# Altium PCB ledchaser.PcbDoc
Units mm, origin at the board's own origin, x right, y up, seen from the top; angles counter-clockwise.
Board outline 87.63 x 81.73 mm, 2 copper layers (Top Layer, Bottom Layer), stack 1.1 mm thick; 19 components, 17 nets, 59 pads, 34 vias.
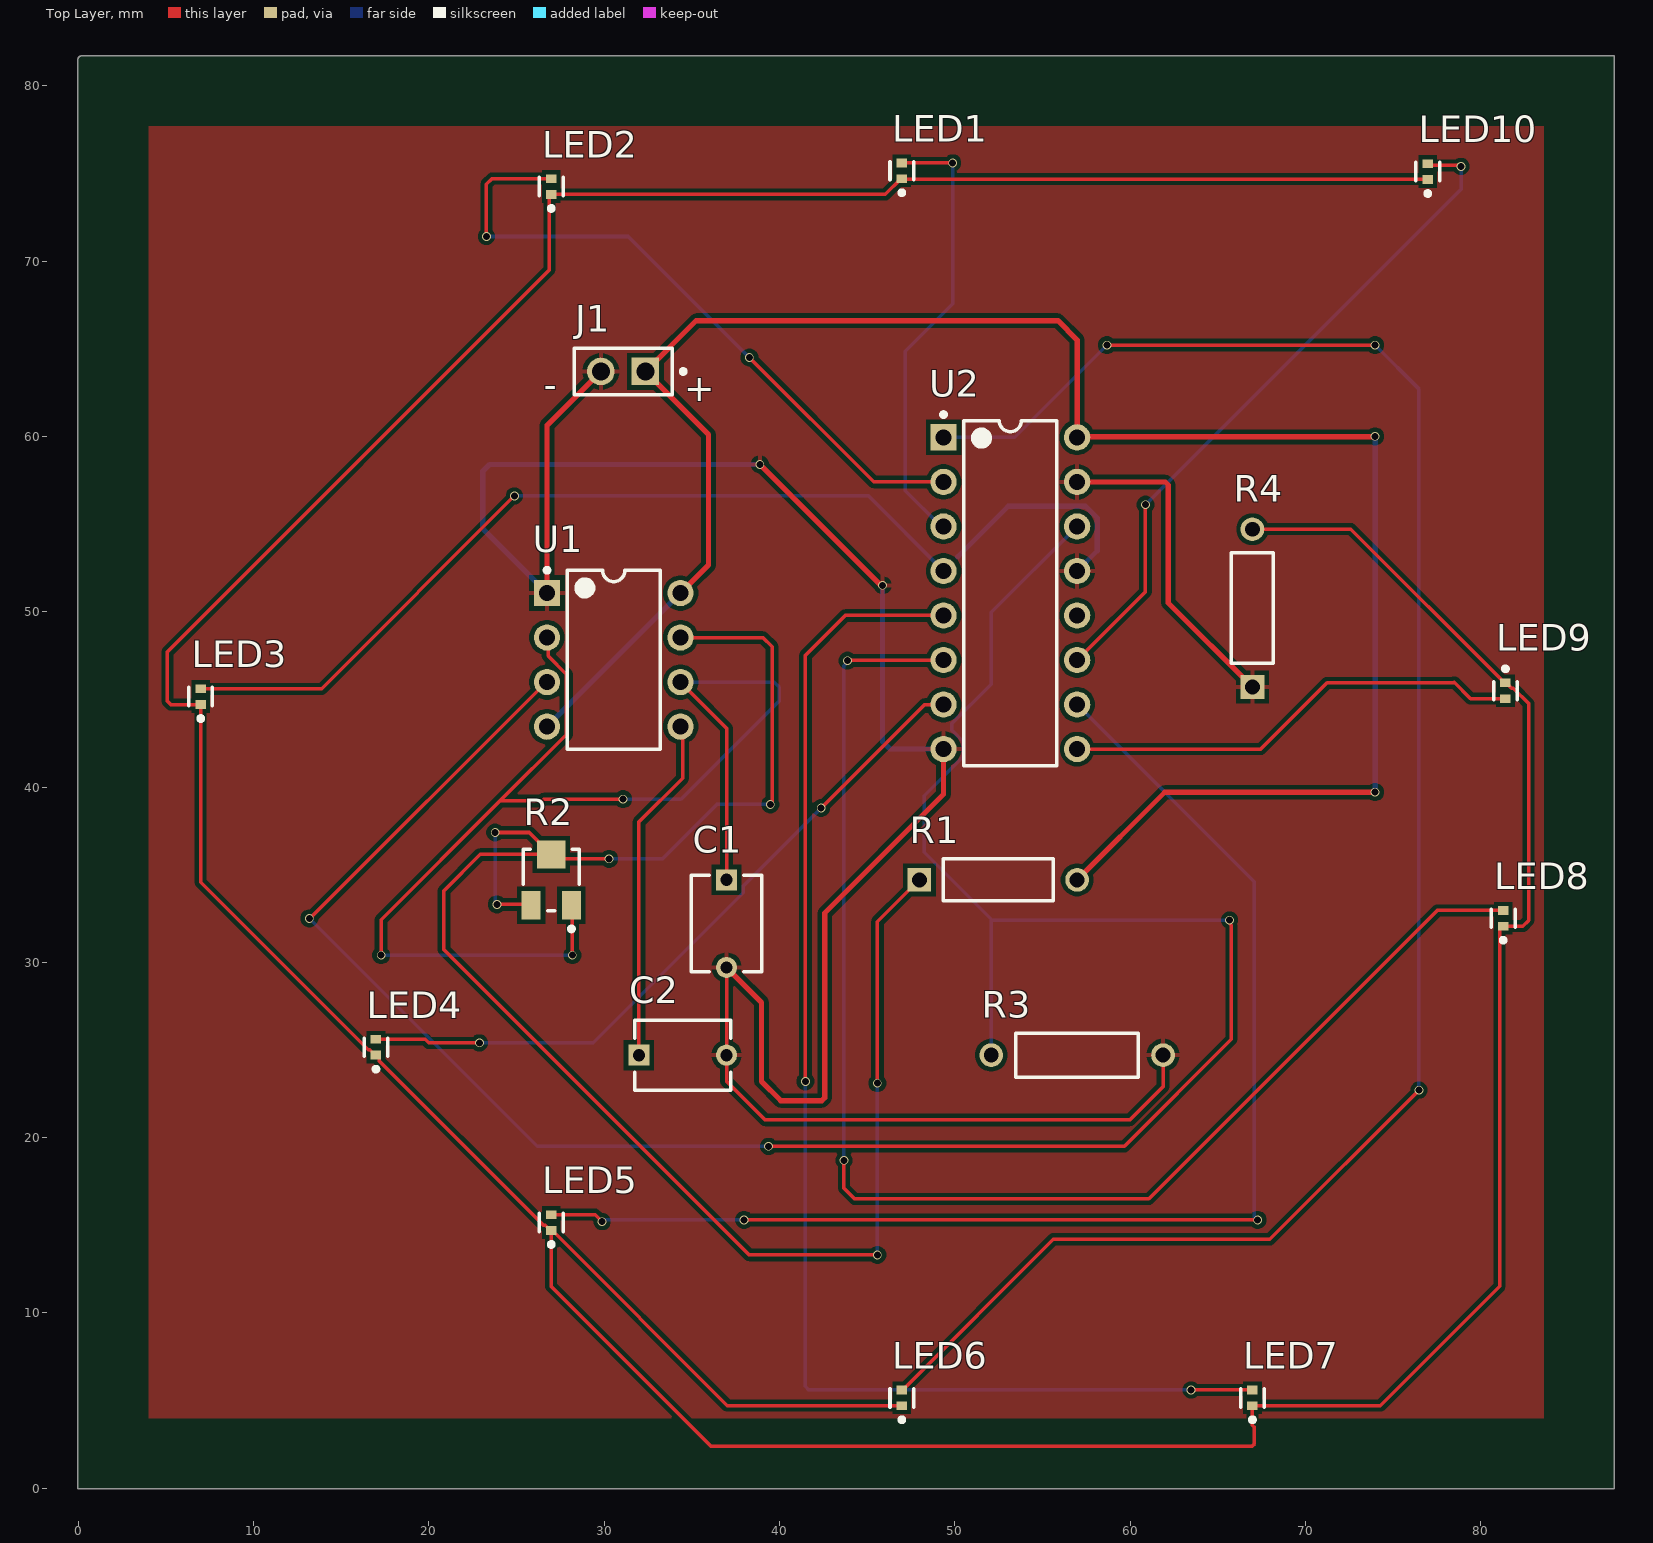
[diagram p0: Top Layer view]
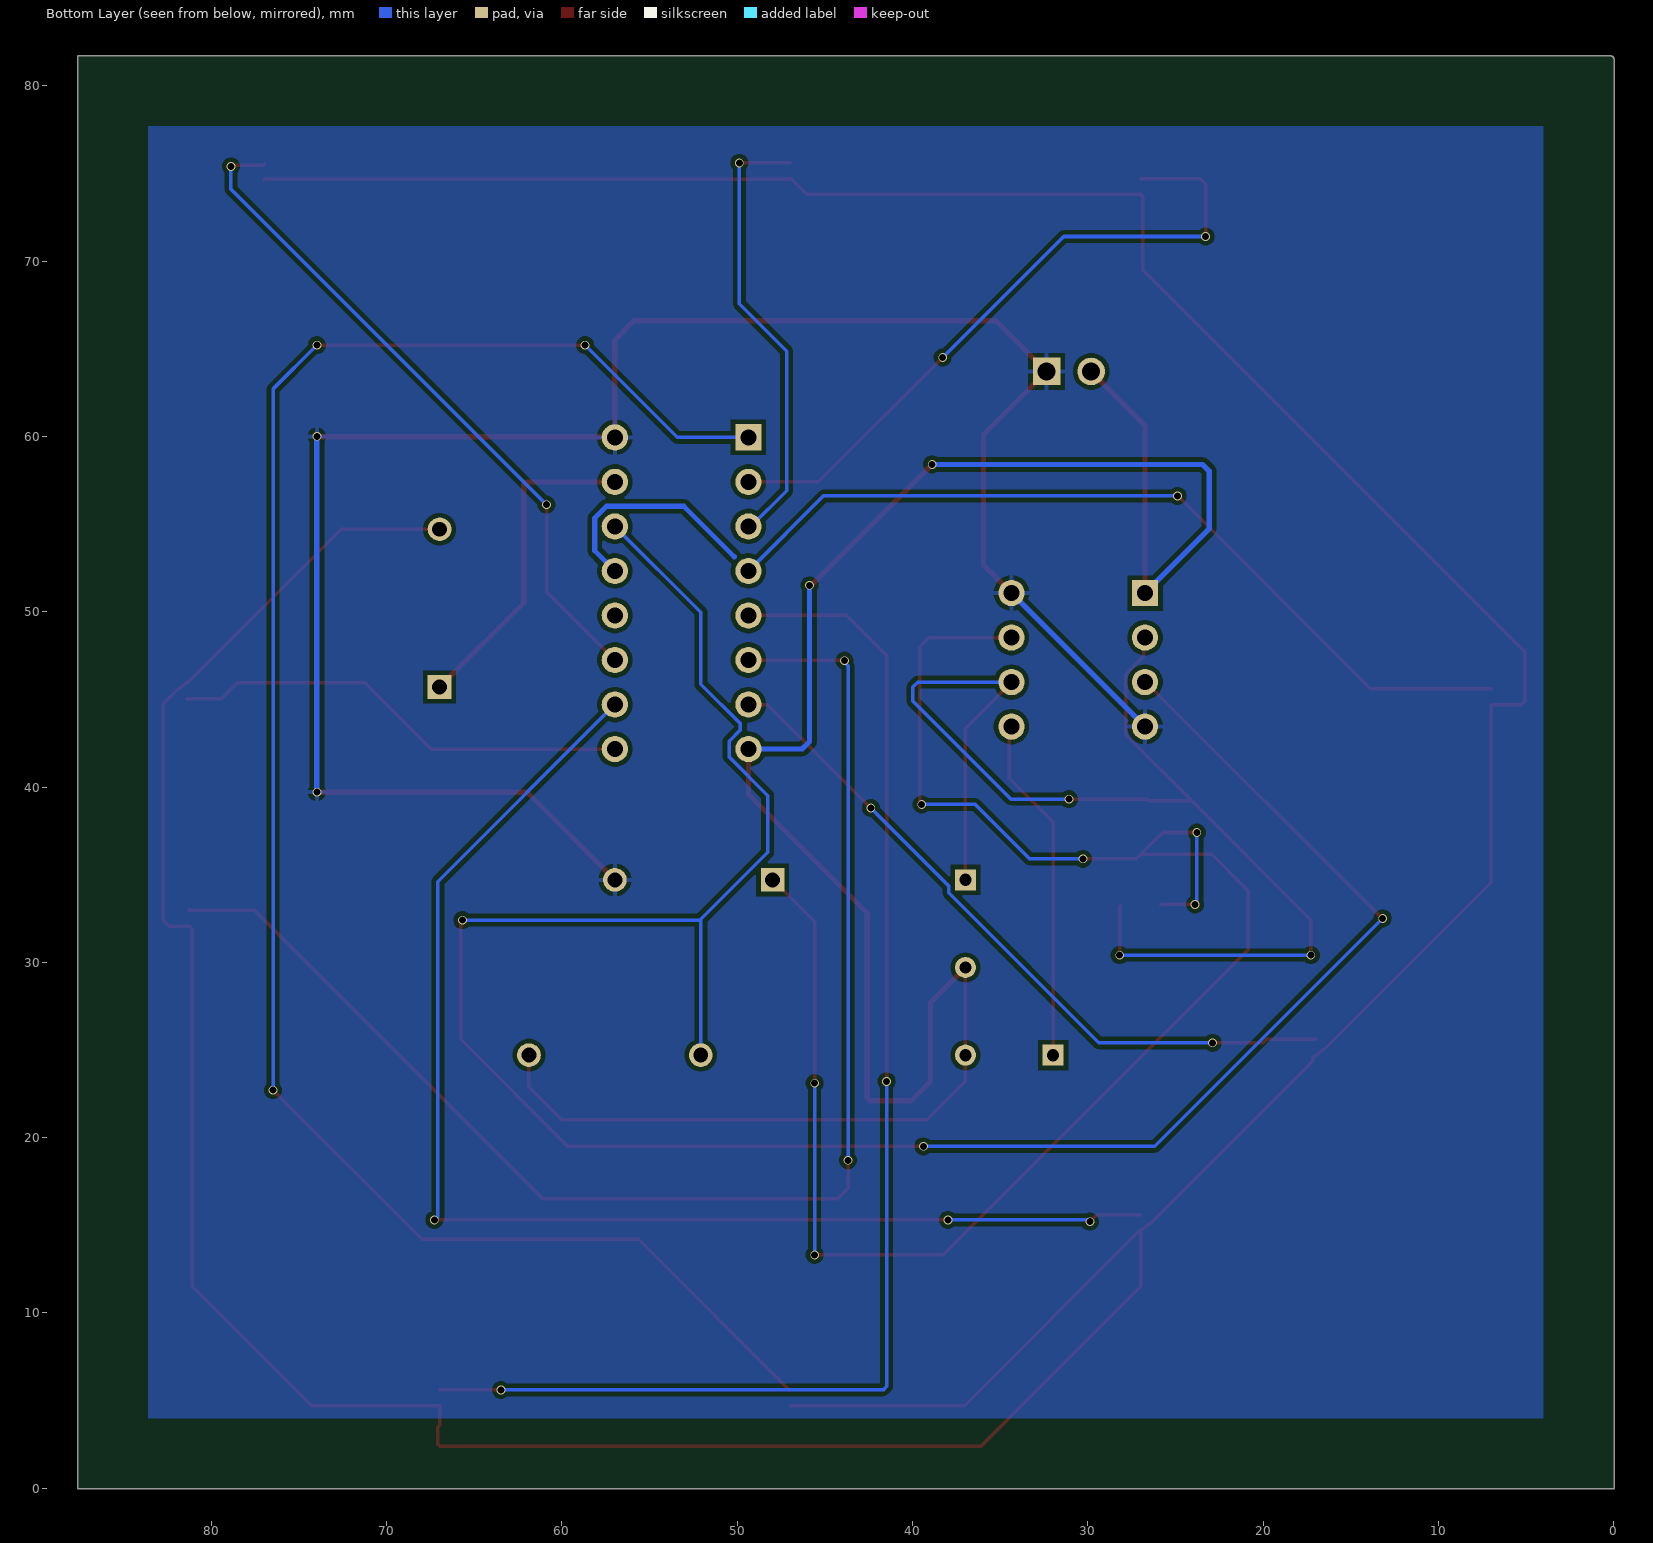
[diagram p1: Bottom Layer view, seen from below]
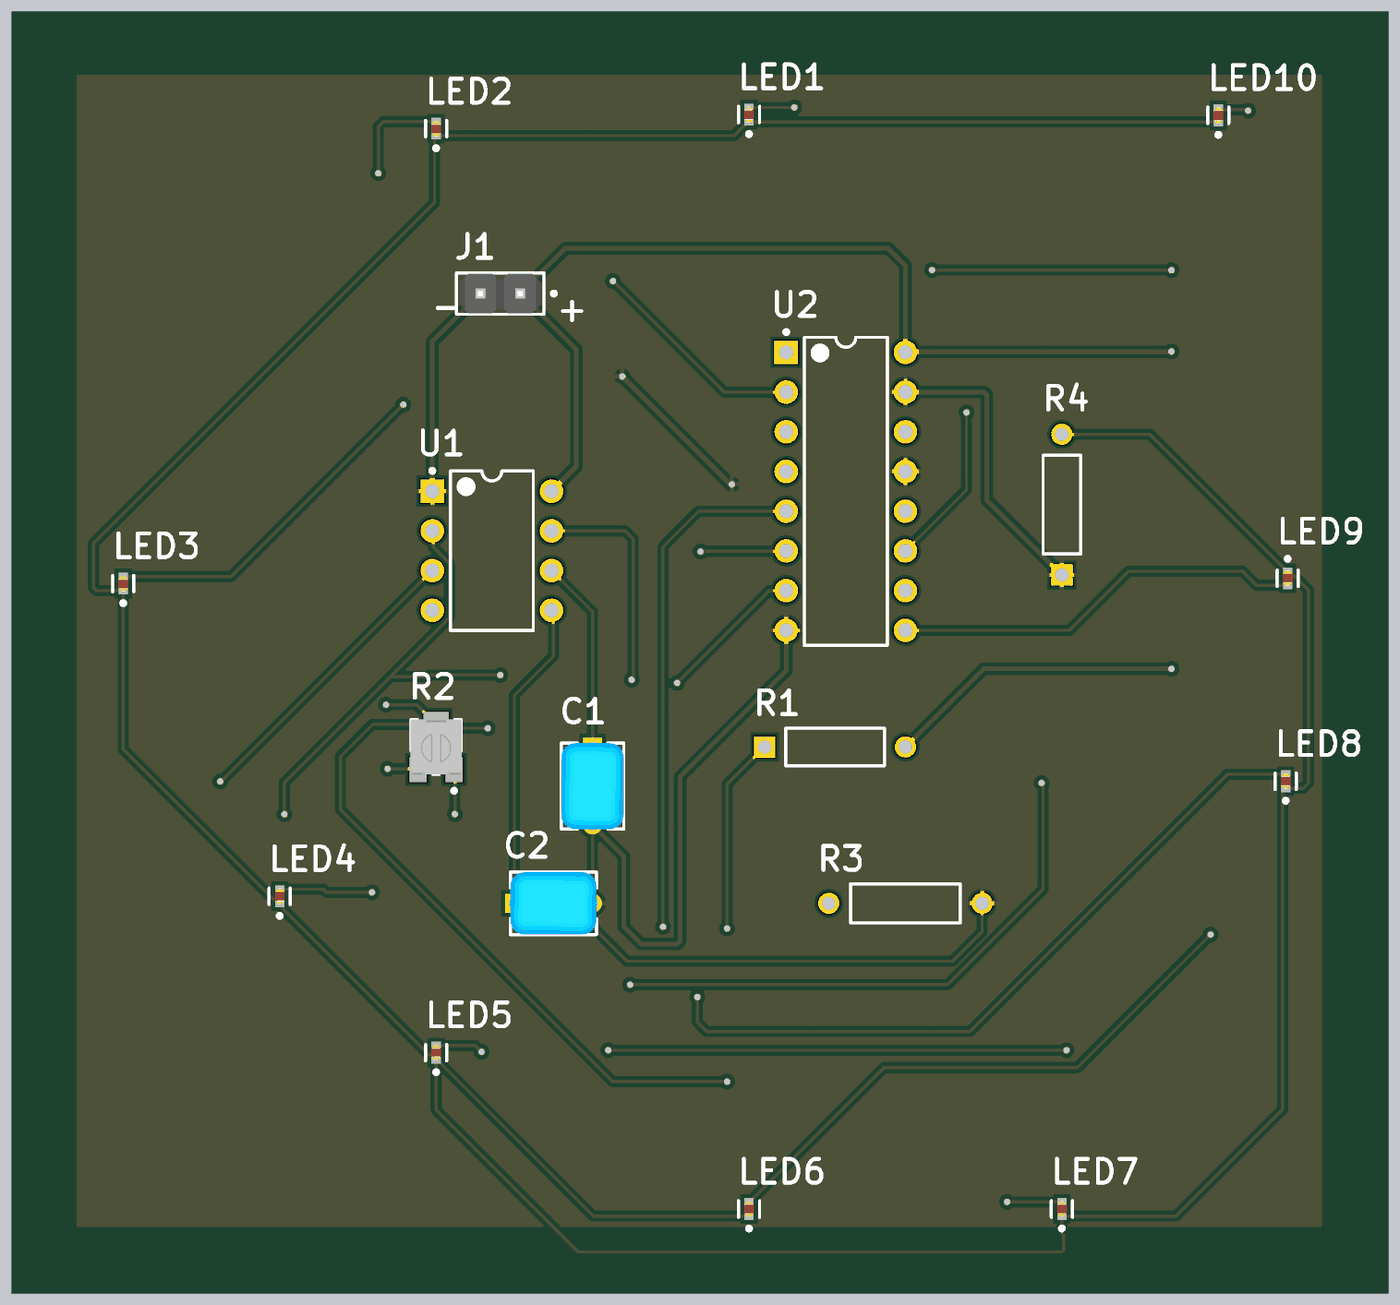
[diagram p2: 3D render of the assembled board from above, using the file's embedded part models]

## Layer stack, top to bottom
Top Solder: solder mask 0.05, SM-001, Dk 4
Top Layer: signal copper 0.1
Dielectric 1: dielectric 0.9, FR-4, Dk 4.8
Bottom Layer: signal copper 0.1
Bottom Solder: solder mask 0.05, SM-001, Dk 4

## Board outline
-0.025,-0.025 87.605,-0.025 87.605,81.705 0.171,81.705 ccw(c0.171,81.509) -0.025,81.509

## Design rules (kind name [scope] priority, off if disabled: settings)
Clearance Clearance_2 [All] p1: gap=0.25 ignorepadtopadclearanceinfootprint=FALSE
Clearance Clearance_1 [All] p2: gap=0.254 ignorepadtopadclearanceinfootprint=FALSE except(0: Arc-Hole Track-Hole SMDPad-Hole THPad-Hole Via-Hole Fill-Hole Poly-Hole Region-Hole Text-Hole)
Clearance [All] p3: gap=0.25 ignorepadtopadclearanceinfootprint=FALSE
NetAntennae [All] p1: netantennaetolerance=39
PolygonConnect [All] p1: connectstyle=Relief reliefconductorwidth=0.254 reliefentries=4 polygonreliefangle="90 Angle" airgapwidth=0.254
RoutingVias [All] p1: holewidth=0.4 width=0.5 viastyle="Through Hole" minholewidth=0.4 minwidth=0.5 maxholewidth=0.4 maxwidth=0.5
SolderMaskExpansion [All] p1: expansion=0.102 istentingtop=FALSE
Width WidthPOW [(InNet('VCC') OR InNet('GND'))] p1: maxlimit=0.3 minlimit=0.2 preferedwidth=0.3
Width [All] p2: maxlimit=0.2 minlimit=0.1 preferedwidth=0.2
29 further rules are at their usual default settings.

## Components (designator, comment, footprint, x,y, rotation, side; value= is the part's Value field where it differs from the comment)
C1 "RCER71E226MWM1H03A" FP-RCEWM1-MFG 36.975,32.205 r270 top
C2 "RCER71E226MWM1H03A" FP-RCEWM1-MFG 34.475,24.705 r0 top
J1 "M20-9990246" FP-M20-9990246-MFG 31.075,63.705 r180 top
LED1 "SML-P11UTT86" FP-SML-P11UTT86-MFG 46.975,75.155 r90 top
LED2 "SML-P11UTT86" FP-SML-P11UTT86-MFG 26.975,74.255 r90 top
LED3 "SML-P11UTT86" FP-SML-P11UTT86-MFG 6.975,45.155 r90 top
LED4 "SML-P11UTT86" FP-SML-P11UTT86-MFG 16.975,25.155 r90 top
LED5 "SML-P11UTT86" FP-SML-P11UTT86-MFG 26.975,15.155 r90 top
LED6 "SML-P11UTT86" FP-SML-P11UTT86-MFG 46.975,5.155 r90 top
LED7 "SML-P11UTT86" FP-SML-P11UTT86-MFG 66.975,5.155 r90 top
LED8 "SML-P11UTT86" FP-SML-P11UTT86-MFG 81.28,32.512 r90 top
LED9 "SML-P11UTT86" FP-SML-P11UTT86-MFG 81.407,45.491 r270 top
LED10 "SML-P11UTT86" FP-SML-P11UTT86-MFG 76.975,75.105 r90 top
R1 "MFR-25FBF52-1K" RESA60-630X240 52.475,34.705 r0 top
R2 "3313J-1-503E" BOUR-3313J-1_V 26.975,34.705 r90 top
R3 "OD103JE" OMTE-RES7X2.5-2 56.975,24.705 r180 top
R4 "MFR-25FBF52-1K" RESA60-630X240 66.975,50.205 r90 top
U1 "NE555P" P0008A 30.541,47.255 r0 top
U2 "CD74HC4017E" N0016A 53.165,51.055 r0 top

## Footprints (in the part's own frame and the unit in brackets; to place one, negate y for a bottom-side part, rotate by r counter-clockwise, add the part's x,y. Pads: shape width x height; smd on the part's side, far side on the other; paste and mask are expansions set on the pad)
BOUR-3313J-1_V [mm] "SMD, 3-Leads, Body 3.5x3.2mm, Pitch 1.15mm"
  rect 1.6x1.1 smd paste+0: 1(-1.45,-1.15) 3(-1.45,1.15)
  rect 1.6x1.6 smd paste+0: 2(1.45,0)
  silkscreen extent -2.92,-1.6 1.75,1.6, body extent -1.75,-1.65 1.75,1.65, height 2.11
FP-M20-9990246-MFG [mm]
  rect 1.57x1.57 hole 1.02 paste-2539.97 mask+0: 1(-1.27,0)
  round 1.57 hole 1.02 paste-2539.97 mask+0: 2(1.27,0)
  silkscreen extent -3.55,-1.32 2.79,1.32, body extent -2.89,-1.42 2.89,1.42, height 0.25
FP-RCEWM1-MFG [mm]
  rect 1.2x1.2 hole 0.7 paste-2539.97 mask+0: 1(-2.5,0)
  round 1.2 hole 0.7 paste-2539.97 mask+0: 2(2.5,0)
  silkscreen extent -2.75,-2 2.75,2, body extent -3.2,-2.1 3.2,2.1, height 0.25
FP-SML-P11UTT86-MFG [mm]
  rect 0.5x0.6 smd paste+0 mask+0: 1(-0.45,0) 2(0.45,0)
  silkscreen extent -1.37,-0.67 0.53,0.67, body extent -0.8,-0.43 0.8,0.43, height 0.25
N0016A [mm] "DIP, 16-Leads, Body 19.7x6.6mm, Pitch 2.54mm"
  rect 1.5x1.5 hole 0.9: 1(-3.81,8.89)
  round 1.5 hole 0.9: 2(-3.81,6.35) 3(-3.81,3.81) 4(-3.81,1.27) 5(-3.81,-1.27) 6(-3.81,-3.81) 7(-3.81,-6.35) 8(-3.81,-8.89) 9(3.81,-8.89) 10(3.81,-6.35) 11(3.81,-3.81) 12(3.81,-1.27) 13(3.81,1.27) 14(3.81,3.81) 15(3.81,6.35) 16(3.81,8.89)
  silkscreen extent -3.93,-9.85 2.65,10.31, body extent -3.95,-9.85 3.95,9.85, height 5.08
OMTE-RES7X2.5-2 [mm] "Resistor, Axial; Body 7x2.5mm, Lead Dia. 0.6mm"
  round 1.35 hole 0.85: 1(-4.9,0) 2(4.9,0)
  silkscreen extent -3.5,-1.25 3.5,1.25, body extent -3.5,-1.25 3.5,1.25, height 2.5
P0008A [mm] "DIP, 8-Leads, Body 10.15x6.6mm, Pitch 2.54mm"
  rect 1.5x1.5 hole 0.9: 1(-3.81,3.81)
  round 1.5 hole 0.9: 2(-3.81,1.27) 3(-3.81,-1.27) 4(-3.81,-3.81) 5(3.81,-3.81) 6(3.81,-1.27) 7(3.81,1.27) 8(3.81,3.81)
  silkscreen extent -3.93,-5.1 2.65,5.23, body extent -3.95,-5.07 3.95,5.07, height 5.08
RESA60-630X240 [mm] "Axial Resistor, 2-Leads, Dia 2.4mm, Body Length 6.3mm"
  rect 1.35x1.35 hole 0.85: 1(-4.5,0)
  round 1.35 hole 0.85: 2(4.5,0)
  silkscreen extent -3.15,-1.2 3.15,1.2, body extent -3.15,-1.2 3.15,1.2, height 2.4

## Part data
C1: library part CMP-06035-003622-1, "CAP CER 22UF 25V X7R RADIAL", Capacitance=22uF, Case/Package=Radial, Dielectric=X7R, Max Operating Temperature=125°C, Min Operating Temperature=-55°C, Package Quantity=1500, Ratings=AEC-Q200, Resistor Type=Ceramic, Tolerance=20%, Voltage Rating=25V, Height=7.5mm, Height - Seated (Max)=0.295inch, Lead Diameter=0.5mm, Lead Pitch=0.197inch, Lead/Base Style="Formed Leads", Length=0.217inch, Mount="Through Hole", Packaging="Tape and Reel", Termination=Radial, Voltage Rating (DC)=25V, Width=0.157inch
C2: library part CMP-06035-003622-1, "CAP CER 22UF 25V X7R RADIAL", Capacitance=10nF, Case/Package=Radial, Dielectric=X7R, Max Operating Temperature=125°C, Min Operating Temperature=-55°C, Package Quantity=1500, Ratings=AEC-Q200, Resistor Type=Ceramic, Tolerance=20%, Voltage Rating=25V, Height=7.5mm, Height - Seated (Max)=0.295inch, Lead Diameter=0.5mm, Lead Pitch=0.197inch, Lead/Base Style="Formed Leads", Length=0.217inch, Mount="Through Hole", Packaging="Tape and Reel", Termination=Radial, Voltage Rating (DC)=25V, Width=0.157inch
J1: library part CMP-15831-000009-1, "CONN HEADER VERT 2POS 2.54MM", Current Rating=3A, Manufacturer=Harwin, Temperature="-40°C to +105°C", Temperature Range High=+105°C, Temperature Range Low=-40°C, Automotive=No, Category=Conn, ComponentLink2Description=Datasheet, ComponentLink2URL=https://cdn.harwin.com/pdfs/M20-999.pdf, Conn Gender=Male, Conn Orientation=Vertical, Contact Material=Tin,Nickel, Device Class L1=Connectors, Device Class L2="Headers and Wire Housings", Device Class L3=unset, Digikey Description="CONN HEADER VERT 2POS 2.54MM", Height=8.99mm, Lead Free=Yes, Manufacturer Part Number=M20-9990246, Mouser Description="2.54mm (0.1\") Pitch SIL Vertical PC Tail Pin Header, 6.1mm mating pin height, tin, 2 contacts", Number Of Contacts=2, Number of Rows=1, Octopart=https://octopart.com/m20-9990246-harwin-2590635, Package=M20-9990246, Pitch=2.54mm, RoHS=TRUE
LED1 LED2 LED3 LED4 LED5 LED6 LED7 LED8 LED9 LED10: library part CMP-08952-000028-1, "LED RED CLEAR 1006 SMD", Case Code (Imperial)=0402, Case Code (Metric)=1005, Color=Red, Forward Current=20mA, Forward Voltage=1.8V, Lens Color=Colorless, Max Operating Temperature=85°C, Min Operating Temperature=-40°C, Package Quantity=1, Test Current=1mA, Case/Package=0402, Dominant Wavelength=621nm, Height=0.25mm, Illumination Color=Red, Lead Free="Lead Free", Length=1mm, Lens Style=Square, Lens Transparency=Clear, Luminous Intensity=5.5mcd, Mount="Surface Mount", Number of LEDs=1, Number of Pins=2, Packaging="Tape and Reel", Radiation Hardening=No, REACH SVHC="No SVHC", RoHS Compliant=Yes, Series=PicoLED™, Viewing Angle=150°, Wavelength=621nm, Width=0.6mm
R1: library part CMP-1659-00075-1, "Axial Resistor, 1 KOhm, +/- 1%, 250 mW, -55 to 155 degC, 2-Pin THD, RoHS, Bulk", Case\Package=Axial, Max Operating Temperature="155 degC", Min Operating Temperature="-55 degC", Package Quantity=200, Power Rating="250 mW", Resistance=1M, Tolerance=1%, Voltage Rating="250 V", ComponentLink1Description="Manufacturer URL", ComponentLink1URL=http://www.yageo.com/, ComponentLink2Description=Datasheet, ComponentLink2URL=http://www.yageo.com/documents/recent/Yageo%20LR_MFR_2013.pdf, DatasheetVersion=Apr-13, Length="0.248 inch", PackageDescription="2-Pin Axial Lead, Dia 2.4 mm, Body Length 6.3 mm", PackageReference=MFR-25, Packaging=Bulk, RoHSCompliant=true
R2: library part CMP-2000-05588-1, "3 mm Trimpot(R) Trimming Potentiometer, 50 KOhm, +/- 20%, 0.125 W, -55 to 125 degC, 3-Pin SMD, RoHS, Tape and Reel", Manufacturer=Bourns, Package Description="3-Pin Surface Mount Device, Body 3.5 x 3.2 mm, Pitch 1.15 mm", Package Reference=3313J-1, Power Rating=125mW, Resistance Tolerance=±20%, Temperature Coefficient=±150ppm/°C, Track Resistance=50kohm, Datasheet URL=http://www.bourns.com/docs/Product-Datasheets/3313.pdf, Datasheet Version=05/2016, Manufacturer URL=http://www.bourns.com/, Mounting Technology=SurfaceMount, No. of Turns=1, Potentiometer Mounting=SMD, SVHC=NoSVHC(19-Dec-2012)
R3: library part CMP-2000-06865-1, "Little Demon(R) Carbon Composition Molded OD Series, 250 V, 10 KOhm, +/-5%, -70 to 130 degC, 2-Pin THD, RoHS, Bulk", Manufacturer=Ohmite, Operating Temperature=-, Package / Case=Axial, Package Description="2-Pin THD Resistor, Body 7 x 2.5 mm, Lead Dia. 0.6 mm", Package Reference=RES7X2.5, Power (Watts)=0.25W,1/4W, Power Rating=0.25W, Resistance (Ohms)=10k, Standard Package=100, Tolerance=±5%, Catalog Drawings=OD,OF,OASeries, Category=Resistors, Composition=CarbonComposition, Datasheet URL=http://www.ohmite.com/cat/res_od_of_oa.pdf, Datasheet Version=06/2016, EDA / CAD Models=DownloadfromAcceleratedDesigns, Family=ThroughHoleResistors, Features=PulseWithstanding, Height=-, Manufacturer URL=http://www.ohmite.com/, Mounting Technology=ThroughHole, Number of Terminations=2, Online Catalog=OD,OF,OASeries,LittleDemon®, Packaging=Bulk, PartNumber=OD103JE, RoHS Information="LittleDemon\"E\"SeriesMaterialDeclaration", Series=LittleDemon®OD, Size / Dimension="0.098\"Diax0.276\"L(2.50mmx7.00mm)", Supplier Device Package=Axial, Temperature Coefficient=-
R4: library part CMP-1659-00075-1, "Axial Resistor, 1 KOhm, +/- 1%, 250 mW, -55 to 155 degC, 2-Pin THD, RoHS, Bulk", Case\Package=Axial, Max Operating Temperature="155 degC", Min Operating Temperature="-55 degC", Package Quantity=200, Power Rating="250 mW", Resistance=120, Tolerance=1%, Voltage Rating="250 V", ComponentLink1Description="Manufacturer URL", ComponentLink1URL=http://www.yageo.com/, ComponentLink2Description=Datasheet, ComponentLink2URL=http://www.yageo.com/documents/recent/Yageo%20LR_MFR_2013.pdf, DatasheetVersion=Apr-13, Length="0.248 inch", PackageDescription="2-Pin Axial Lead, Dia 2.4 mm, Body Length 6.3 mm", PackageReference=MFR-25, Packaging=Bulk, RoHSCompliant=true
U1: library part CMP-2000-04954-1, "Precision Timer, 4.5 to 16 V, 0 to 70 degC, 8-Pin DIP, Pb-Free, Tube", Manufacturer=TexasInstruments, Maximum High Level Output Current=-200mA, Maximum Low Level Output Current=200mA, Operating Supply Voltage=5, Package=8PDIP, Package Description="8-Pin Double In-line Package, Body 9.59 x 6.35 mm, Pitch 2.54 mm", Package Reference=P8, Category=Timer, Datasheet URL=http://www.ti.com/general/docs/lit/getliterature.tsp?genericPartNumber=NE555&fileType=pdf, Datasheet Version="Rev. I, 09/2014", Manufacturer URL=http://www.ti.com/, Number of Internal Timers=1, Package URL=http://www.ti.com/lit/ml/mpdi001b/mpdi001b.pdf, Packaging=Rail/Tube, Rad Hard=No, Type=Standard
U2: library part CMP-1623-00548-2, "High Speed CMOS Logic Decade Counter/Divider with 10 Decoded Outputs, N0016A, TUBE", F @ Nom Voltage(Max)(Mhz)=28, Generic Part Number=CD74HC4017, ICC @ Nom Voltage(Max)(mA)=0.08, Manufacturer="Texas Instruments", Operating Temperature Range(C)="-55 to 125", Rating=Catalog, tpd @ Nom Voltage(Max)(ns)=54, Voltage(Nom)(V)=3.3,5, Bits(#)=10, Code_JEDEC=MS-001, DatasheetVersion=SCHS200D, Function=Counter, Input Type=LVTTL/CMOS, Inputs=1, Output Drive (IOL/IOH)(Max)(mA)=5.2/-5.2, Output Type=CMOS, PackageReference=N0016A, Schmitt Trigger=No, Technology Family=HC, Type=Decade, VCC(Max)(V)=6, VCC(Min)(V)=2

## Via types
v1: diameter 0.5, hole 0.4, Top Layer to Bottom Layer, tented both sides, 34 vias

## Nets (pads, with @x,y where several pads share a name; then routed paths per layer and width w, separated by ;. In a path a pad name is that pad's centre, name@x,y a point inside that pad or via, vN(x,y) a via of type N, cw(c..) or ccw(c..) an arc to the next point about the centre after c; other vN are vias at no path point)
GND: C1.2 C2.2 J1.2 R3.1 R4.1 U1.1 U2.8 U2.13 U2.15 | length 161.5
  Top Layer w0.2: C1.2 C2.2 36.975,23.205 39.175,21.005 59.975,21.005 61.875,22.905 R3.1
  Top Layer w0.3: U1.1 26.731,60.631 J1.2 ; C1.2 38.975,27.705 38.975,23.205 40.075,22.105 42.399,22.105 42.575,22.28 42.575,32.805 49.355,39.585 U2.8 ; v1(38.875,58.405) 45.736,51.543 45.836,51.543 v1(45.875,51.505) ; U2.15 61.999,57.405 62.175,57.229 62.175,50.505 R4.1
  Bottom Layer w0.3: U1.1 23.075,54.721 23.075,58.029 23.45,58.405 v1(38.875,58.405) ; v1(45.875,51.505) 45.875,42.58 46.29,42.165 U2.8 ; 50.168,53.138 53.045,56.015 57.451,56.015 58.125,55.341 58.125,53.475 U2.13
NetC1_1: C1.1 R2.1 U1.2 U1.6 | length 73.9
  Top Layer w0.2: v1(17.275,30.405) 17.275,32.433 24.046,39.205 ; U1.2 26.796,48.459 26.796,47.475 27.831,46.44 27.831,42.989 24.046,39.205 ; R2.1 28.175,33.205 v1(28.175,30.405) ; v1(31.075,39.305) 26.543,39.305 26.443,39.205 24.046,39.205 ; U1.6 36.975,43.361 C1.1
  Bottom Layer w0.2: v1(17.275,30.405) v1(28.175,30.405) ; v1(31.075,39.305) 34.375,39.305 39.975,44.905 39.975,45.705 39.695,45.985 U1.6
NetC2_1: C2.1 U1.5 | length 19.8
  Top Layer w0.2: C2.1 31.975,38.005 34.475,40.505 34.475,43.321 U1.5
NetLED1_1: LED1.1 LED2.1 LED3.1 LED4.1 LED5.1 LED6.1 LED7.1 LED8.1 LED9.1 LED10.1 R4.2 | length 273.8
  Top Layer w0.2: LED6.1 37.025,4.705 27.025,14.705 LED5.1 ; R4.2 72.594,54.705 81.357,45.941 LED9.1 81.457,45.941 81.757,45.641 81.852,45.641 82.728,44.766 82.728,32.385 82.405,32.062 LED8.1 81.23,32.062 81.08,31.912 81.08,11.51 74.275,4.705 LED7.1 66.975,3.597 67.092,3.48 67.092,2.522 66.975,2.405 36.075,2.405 26.975,11.505 LED5.1 ; LED10.1 76.95,74.68 47,74.68 LED1.1 46.925,74.705 46.025,73.805 LED2.1 26.875,73.705 26.875,69.505 5.075,47.705 5.075,44.905 5.275,44.705 LED3.1 6.975,34.56 16.53,25.005 16.625,25.005 16.925,24.705 LED4.1 17.025,24.705 17.175,24.555 17.175,24.36 26.53,15.005 26.625,15.005 26.925,14.705 LED5.1
NetLED1_2: LED1.2 U2.3 | length 25.7
  Top Layer w0.2: LED1.2 v1(49.875,75.605)
  Bottom Layer w0.2: U2.3 49.215,54.865 47.175,56.905 47.175,64.864 49.875,67.564 v1(49.875,75.605)
NetLED2_2: LED2.2 U2.2 | length 38.7
  Top Layer w0.2: v1(23.275,71.405) 23.275,74.387 23.592,74.705 LED2.2 ; v1(38.275,64.505) 45.375,57.405 U2.2
  Bottom Layer w0.2: v1(23.275,71.405) 31.375,71.405 v1(38.275,64.505)
NetLED3_2: LED3.2 U2.4 | length 48.7
  Top Layer w0.2: LED3.2 13.875,45.605 v1(24.875,56.605)
  Bottom Layer w0.2: v1(24.875,56.605) 45.075,56.605 U2.4
NetLED4_2: LED4.2 U2.7 | length 40.7
  Top Layer w0.2: LED4.2 19.78,25.605 19.98,25.405 v1(22.875,25.405) ; v1(42.375,38.805) 48.275,44.705 U2.7
  Bottom Layer w0.2: v1(22.875,25.405) 29.37,25.405 37.925,33.96 37.925,34.355 v1(42.375,38.805)
NetLED5_2: LED5.2 U2.10 | length 74.2
  Top Layer w0.2: LED5.2 29.475,15.605 v1(29.875,15.205) ; v1(37.975,15.305) v1(67.275,15.305)
  Bottom Layer w0.2: v1(29.875,15.205) 29.956,15.205 30.056,15.305 v1(37.975,15.305) ; U2.10 67.075,34.605 67.075,15.422 67.076,15.422 67.193,15.305 v1(67.275,15.305)
NetLED6_2: LED6.2 U2.1 | length 106.9
  Top Layer w0.2: LED6.2 47.025,5.605 55.621,14.201 67.971,14.201 v1(76.475,22.705) ; v1(58.675,65.205) v1(73.975,65.205)
  Bottom Layer w0.2: U2.1 53.415,59.945 v1(58.675,65.205) ; v1(73.975,65.205) 76.475,62.705 v1(76.475,22.705)
NetLED7_2: LED7.2 U2.5 | length 76.1
  Top Layer w0.2: v1(41.475,23.205) 41.475,47.505 43.755,49.785 U2.5 ; v1(63.475,5.605) LED7.2
  Bottom Layer w0.2: v1(41.475,23.205) 41.475,5.805 41.675,5.605 v1(63.475,5.605)
NetLED8_2: LED8.2 U2.6 | length 80.4
  Top Layer w0.2: v1(43.675,18.705) 43.675,17.105 44.275,16.505 61.075,16.505 77.532,32.962 LED8.2 ; v1(43.875,47.205) 43.895,47.225 49.335,47.225 U2.6
  Bottom Layer w0.2: v1(43.675,18.705) 43.675,46.923 43.875,47.123 v1(43.875,47.205)
NetLED9_2: LED9.2 U2.9 | length 26.5
  Top Layer w0.2: U2.9 57.055,42.085 57.135,42.165 67.453,42.165 71.23,45.941 78.453,45.941 78.486,45.974 79.419,45.041 LED9.2
NetLED10_2: LED10.2 U2.11 | length 39.2
  Top Layer w0.2: U2.11 60.875,51.145 v1(60.875,56.105) ; LED10.2 77.067,75.462 78.817,75.462 v1(78.875,75.405)
  Bottom Layer w0.2: v1(60.875,56.105) 78.875,74.105 v1(78.875,75.405)
NetR1_1: R1.1 R2.2 R2.3 U1.7 | length 102.9
  Top Layer w0.2: v1(23.775,37.405) 25.725,37.405 R2.2 ; v1(23.875,33.305) 25.775,33.305 R2.3 ; v1(30.275,35.905) 27.225,35.905 R2.2 ; U1.7 39.055,48.525 39.575,48.005 39.575,39.105 v1(39.475,39.005) ; v1(45.575,13.305) 38.275,13.305 20.856,30.723 20.856,34.086 22.925,36.155 R2.2 ; v1(45.575,23.105) 45.575,32.305 R1.1
  Bottom Layer w0.2: v1(23.775,37.405) 23.775,33.486 23.875,33.386 v1(23.875,33.305) ; v1(30.275,35.905) 33.325,35.905 36.425,39.005 v1(39.475,39.005) ; v1(45.575,13.305) v1(45.575,23.105)
NetR3_2: R3.2 U1.3 U2.14 | length 136
  Top Layer w0.2: v1(13.175,32.505) 13.213,32.505 26.693,45.985 U1.3 ; v1(39.375,19.505) 59.675,19.505 65.775,25.605 65.775,32.105 65.657,32.222 65.657,32.387 v1(65.675,32.405)
  Bottom Layer w0.2: v1(13.175,32.505) 26.175,19.505 v1(39.375,19.505) ; R3.2 52.075,32.45 ; U2.14 52.075,49.965 52.075,45.869 49.81,43.605 49.81,43.265 50.455,42.62 50.455,41.709 48.255,39.509 48.255,36.27 52.075,32.45 ; v1(65.675,32.405) 52.12,32.405 52.075,32.45
VCC: J1.1 R1.2 U1.4 U1.8 U2.16 | length 113.8
  Top Layer w0.3: U1.8 35.945,52.659 35.945,60.105 J1.1 35.245,66.605 55.875,66.605 56.975,65.505 U2.16 57.005,59.975 73.945,59.975 v1(73.975,60.005) ; R1.2 61.975,39.705 v1(73.975,39.705)
  Bottom Layer w0.3: U1.4 U1.8 ; v1(73.975,39.705) v1(73.975,60.005)
pads on no net: U2.12

## Polygon pours and split planes (outlines as drawn)
GND on Top Layer "GND_L01_P000" (solid, remove dead copper, pour order 0): 4,77.7 4,4 83.6,4 83.6,77.7
VCC on Bottom Layer "VCC_L02_P001" (solid, remove dead copper, pour order 1): 4,77.7 4,4 83.6,4 83.6,77.7

## Silkscreen, mask and mechanical layers (free items; w line width, h text height)
Top Overlay:
  text "-" at 26.554,62.192 h1.52
  text "+" at 34.554,62 h1.52
Board:
  lines w0.5: 0.1,0.4 0.2,0.3 87.3,0.3 87.6,0 87.6,81.2 87.4,81.4 0.2,81.4 0.1,81.5 0.1,0.4